# Altium PCB GATEWAY.PcbDoc
Units mil, origin at the board's own origin, x right, y up, seen from the top; angles counter-clockwise.
Board outline 2898.77 x 4223.77 mil, 2 copper layers (Top Layer, Bottom Layer); 20 components, 18 nets, 109 pads, 11 vias.
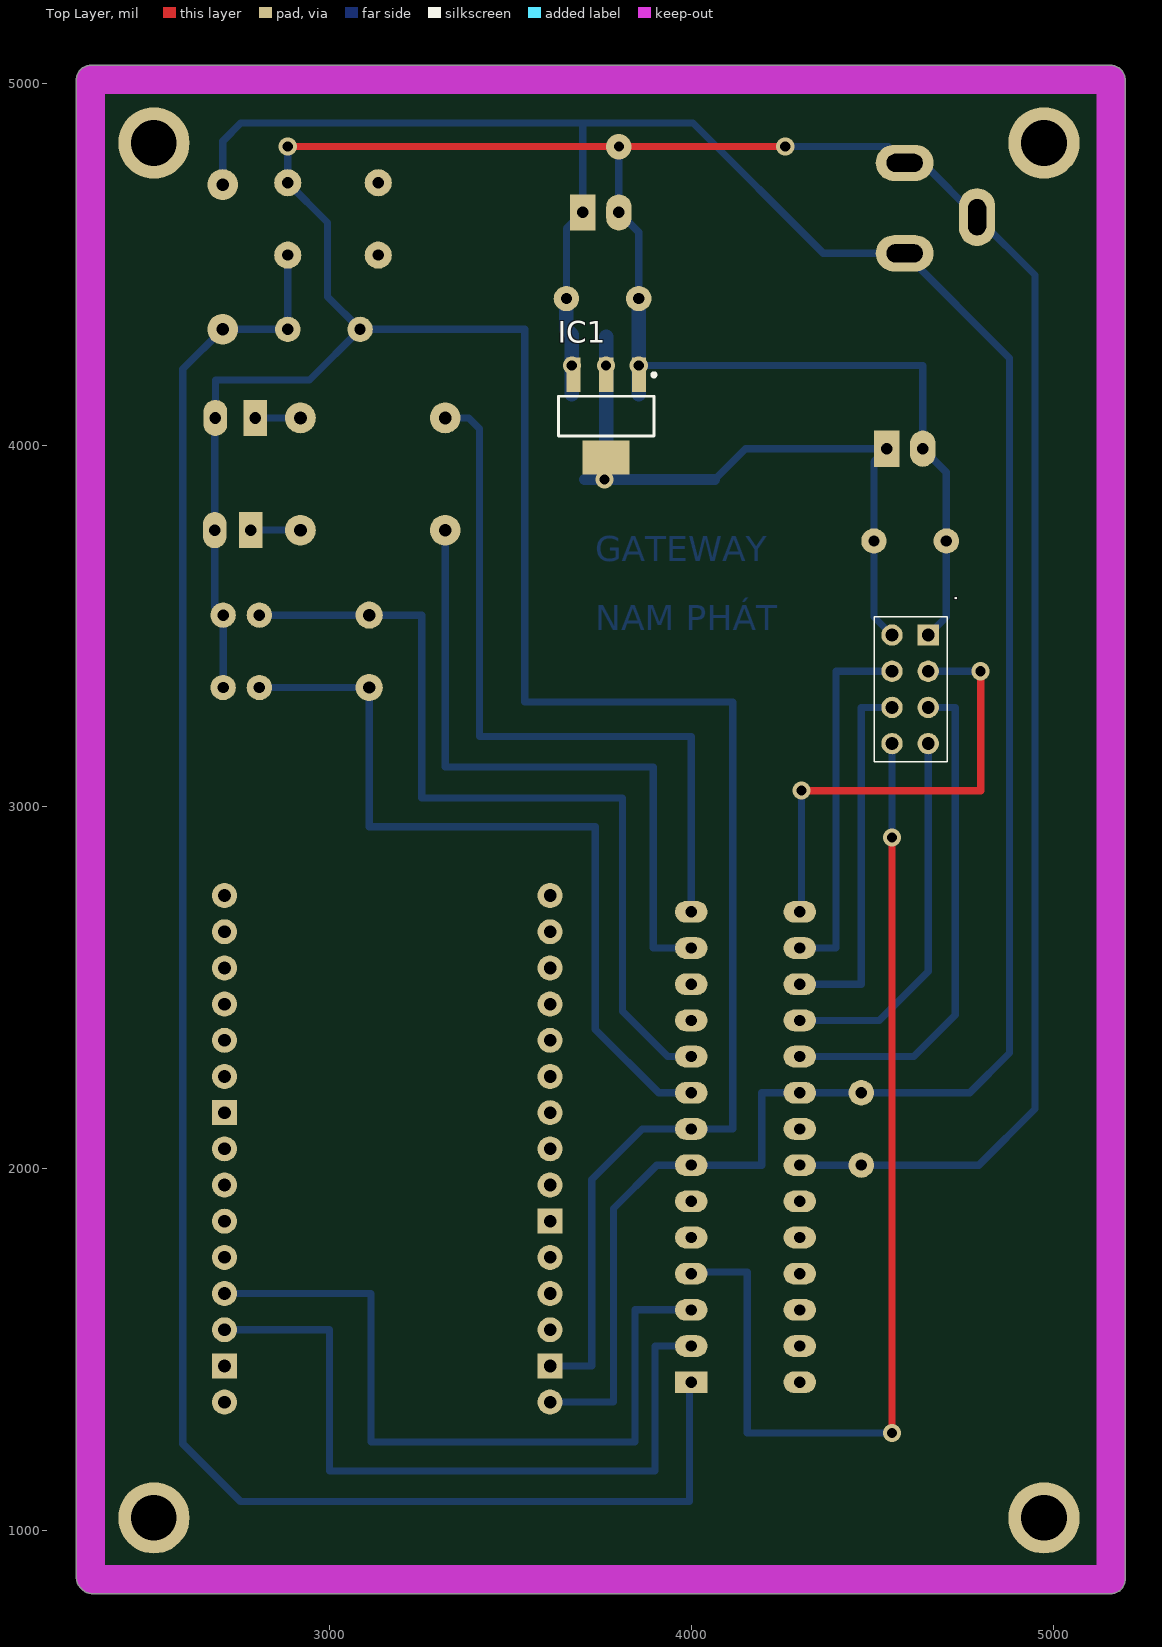
[diagram p0: Top Layer view]
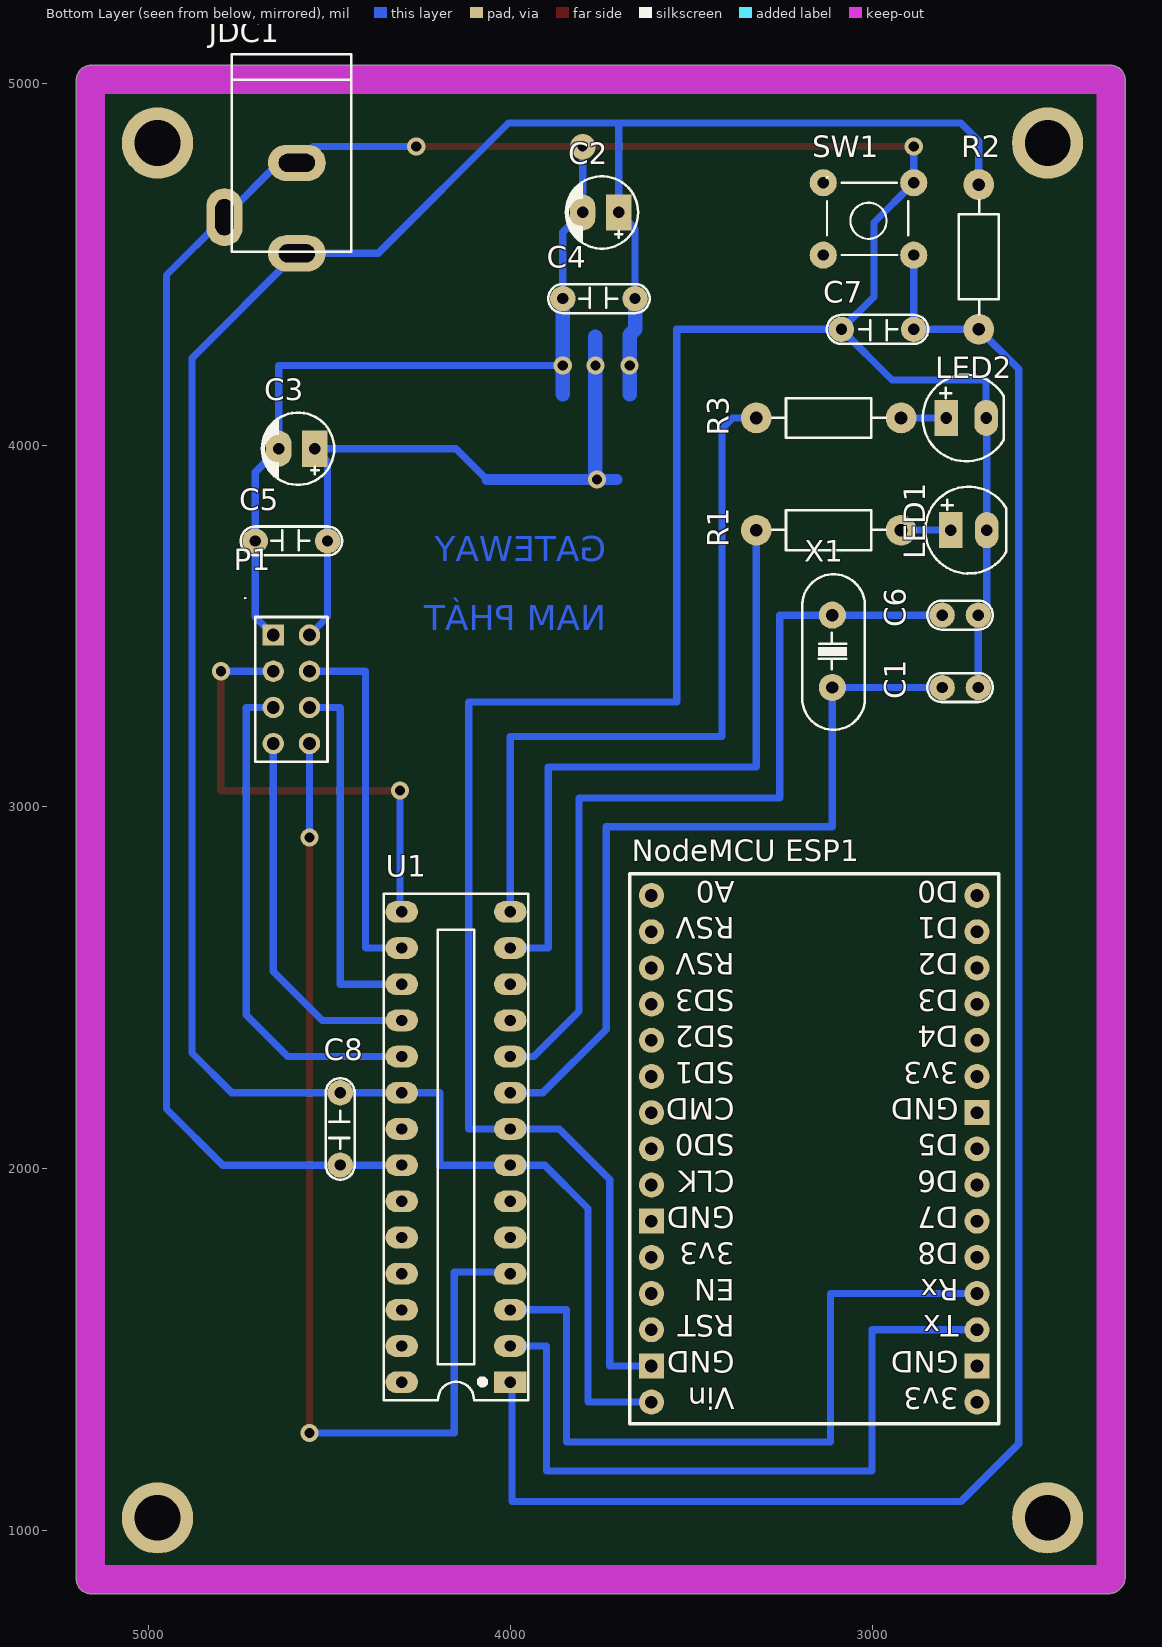
[diagram p1: Bottom Layer view, seen from below]
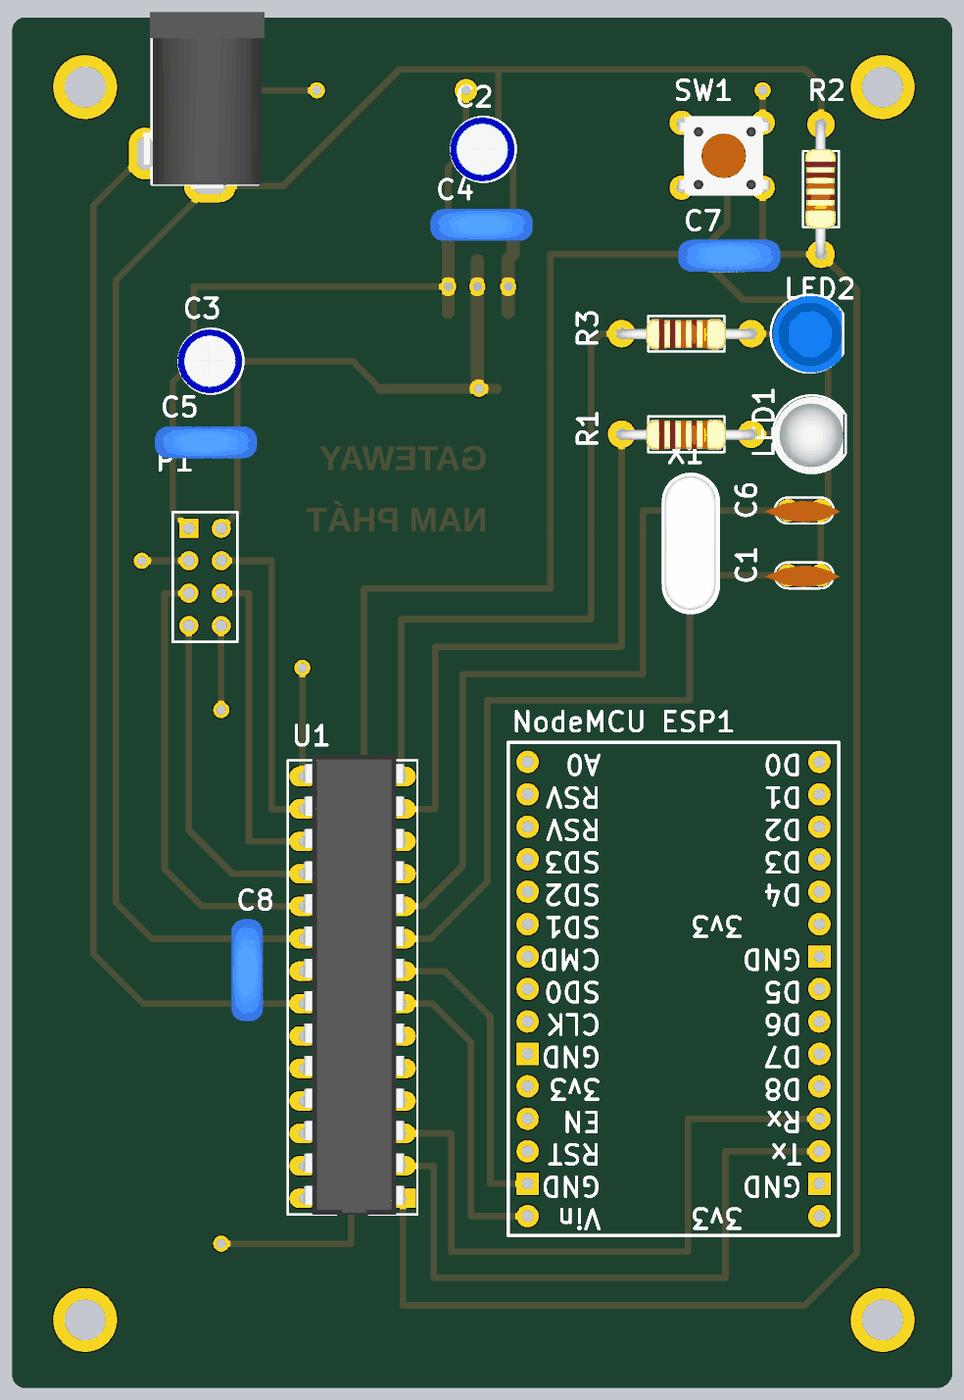
[diagram p2: 3D render of the assembled board from below, using the file's embedded part models]

## Layer stack, top to bottom
Top Solder: solder mask 0.4, Solder Resist, Dk 3.5
Top Layer: signal copper 1.4
Dielectric 1: dielectric 12.6, FR-4, Dk 4.8
Bottom Layer: signal copper 1.4
Bottom Solder: solder mask 0.4, Solder Resist, Dk 3.5

## Board outline
2300.61,870 ccw(c2340,870) 2314.76,839.76 ccw(c2345,865) 2345,825.62 5160,825.62 ccw(c5160,865) 5199.39,865 5199.39,5010 ccw(c5160,5010) 5160,5049.39 2340,5049.39 ccw(c2340,5010) 2300.61,5010

## Design rules (kind name [scope] priority, off if disabled: settings)
Clearance [All] p1: gap=20 ignorepadtopadclearanceinfootprint=FALSE
PolygonConnect [All] p1: connectstyle=Relief reliefconductorwidth=10 reliefentries=4 polygonreliefangle="90 Angle" airgapwidth=10
RoutingVias [All] p1: holewidth=30 width=70 viastyle="Through Hole" minholewidth=30 minwidth=70 maxholewidth=30 maxwidth=70
SolderMaskExpansion [All] p1: expansion=4
Width [All] p1: maxlimit=20 minlimit=20 preferedwidth=20
30 further rules are at their usual default settings.

## Components (designator, comment, footprint, x,y, rotation, side; value= is the part's Value field where it differs from the comment)
C1 "22pF" CN1 2706.43,3330 r0 bottom value=100pF
C2 "10uF" CP1/2 3700,4643 r0 bottom value=10uF/50V
C3 "10uF" CP1/2 4540,3990 r0 bottom value=10uF/50V
C4 "104" CN2 3855,4405 r180 bottom value=0.1uF
C5 "104" CN2 4705,3735 r180 bottom value=0.1uF
C6 "22pF" CN1 2706.43,3530 r0 bottom value=100pF
C7 "104" CN2 2885,4320 r0 bottom value=0.1uF
C8 "104" CN2 4470,2010 r90 bottom value=0.1uF
IC1 "LM1117" SOT223-4N 3765,4080 r270 top value=LM317
JDC1 "Jac DC" DC0 4690,4655 r270 bottom
LED1 "LED" LED-5-Yellow 2783,3765 r180 bottom value="LED 3 ly Single Colour"
LED2 "LED" LED-5-BLUE 2740,4075 r180 bottom value="LED 3 ly Single Colour"
"NodeMCU ESP1" "NodeMCU" "NodeMCU DevKit v1.0 - Inside Labels" 2710,1355 r0 bottom
P1 "Header 4X2" HDR2X4 4655,3475 r270 bottom
R1 "330" R1/2W 2920,3765 r0 bottom value="R1/4W - 1K"
R2 "10K" R1/2W 2705,4320 r90 bottom value="R1/4W - 1K"
R3 "330" R1/2W 2920,4075 r0 bottom value="R1/4W - 1K"
SW1 "SW" SW4 2885,4525 r0 bottom value="Button chip 4 pin"
U1 "ATmega328-PU" DIP28 4000,1410 r90 bottom
X1 "16Mhz" XT2 3110,3430 r270 bottom value=4Mhz

## Footprints (in the part's own frame and the unit in brackets; to place one, negate y for a bottom-side part, rotate by r counter-clockwise, add the part's x,y. Pads: shape width x height; smd on the part's side, far side on the other; paste and mask are expansions set on the pad)
CN1 [mil]
  round 70 hole 31: 1(0,0) 2(100,0)
  silkscreen extent -40,-40 141,40, body extent -60,-30 170,37, height 265
CN2 [mil]
  round 70 hole 31: 1(0,0) 2(200,0)
  silkscreen extent -40,-40 240,40, body extent -54,-44 260,55, height 407
CP1/2 [mil] "Tu hoa < 22uF/16>50V"
  rect 70x100 hole 32: 1(0,0)
  oval 70x100 hole 32: 2(100,0)
  silkscreen extent -53,-100 147,100, body extent -49,-99 149,99, height 287
DC0 [mil] "Jac DC input"
  oval 100x160 hole 50 slot 100 at 90 deg: 1(125,100) 2(-125,100)
  oval 160x100 hole 50 slot 100 at 0 deg: 3(25,-100)
  silkscreen extent -425,-80 120,250, body extent -410,-105 134,269, height 434
DIP28 [mil] "DIP, 18-Leads, Row Spacing 7.62mm, Pitch 2.54mm, Body 22.8x7.3mm, Window"
  rect 60x90 hole 31: 1(0,0)
  oval 60x90 hole 31: 2(100,0) 3(200,0) 4(300,0) 5(400,0) 6(500,0) 7(600,0) 8(700,0) 9(800,0) 10(900,0) 11(1000,0) 12(1100,0) 13(1200,0) 14(1300,0) 15(1300,300) 16(1200,300) 17(1100,300) 18(1000,300) 19(900,300) 20(800,300) 21(700,300) 22(600,300) 23(500,300) 24(400,300) 25(300,300) 26(200,300) 27(100,300) 28(0,300)
  silkscreen extent -50,-50 1350,350, body extent -50,-10 1367,300, height 200
HDR2X4 [mm]
  rect 1.5x1.5 hole 0.9: 1(0,0)
  round 1.5 hole 0.9: 2(0,2.54) 3(2.54,0) 4(2.54,2.54) 5(5.08,0) 6(5.08,2.54) 7(7.62,0) 8(7.62,2.54)
  silkscreen extent -1.27,-1.27 8.89,3.81, body extent -1.27,-1.27 8.89,3.81, height 8.89
LED-5-BLUE [mil] "LED 2 PIN, 5 ly , Only colour, pin to pin 110mil"
  rect 65x100 hole 32: 1(-55,0)
  oval 65x100 hole 32: 2(55,0)
  silkscreen extent -120,-120 104,120, body extent -113,-120 100,116, height 339
LED-5-Yellow [mil] "LED 2 PIN, 5 ly , Only colour,pin to pin 100mil"
  rect 65x100 hole 32: 1(0,0)
  oval 65x100 hole 32: 2(100,0)
  silkscreen extent -70,-120 154,120, body extent -67,-122 147,115, height 339
"NodeMCU DevKit v1.0 - Inside Labels" [mil]
  round 69 hole 35: 1(0,0) 3(0,-200) 4(0,-300) 5(0,-400) 6(0,-500) 7(0,-600) 8(0,-700) 10(0,-900) 11(0,-1000) 12(0,-1100) 13(0,-1200) 14(0,-1300) 15(0,-1400) 16(900,-1400) 17(900,-1300) 18(900,-1200) 19(900,-1100) 20(900,-1000) 21(900,-900) 22(900,-800) 23(900,-700) 24(900,-600) 26(900,-400) 27(900,-300) 28(900,-200) 30(900,0)
  rect 69x69 hole 35: 2(0,-100) 9(0,-800) 25(900,-500) 29(900,-100)
  silkscreen extent -60,-1460 960,60
R1/2W [mil] "R 1/2W, 2 pin, 300mil"
  round 85 hole 35: 1(0,0) 2(400,0)
  silkscreen extent 42,-55 356,55, body extent -12,-45 414,49, height 91
SOT223-4N [mm] "SOT223, 4-Leads, Body 6.5x3.5mm, Pitch 2.3mm, Lead Span 7mm, IPC Medium Density"
  rect 2.4x1 smd: 1(-2.9,2.3) 2(-2.9,0) 3(-2.9,-2.3)
  rect 2.4x3.3 smd: 4(2.9,0)
  silkscreen extent -3.02,-3.35 1.4,3.48, body extent -3.39,-3.27 3.5,3.23, height 1.72
SW4 [mil] "SW button 4pin, 250 x250 mil"
  round 75 hole 31: 1(0,0) 2(250,-200) 3(250,0) 4(0,-200)
  silkscreen extent 15,-215 240,0, body extent -36,-220 276,24, height 276
XT2 [mil] "Footpin for Crystal 2 pin"
  round 75 hole 34: 1(-100,0) 2(100,0)
  silkscreen extent -213,-83 217,90, body extent -216,-87 216,90, height 144

## Part data
C1 C6: library part CN1, "Cap np  1pF - 472pF"
C2 C3: library part CP1, "Cap P  0,1uF < 22uF , 16 - 50V", Description 1="10 => 220uF/6,3V/10V - 10uF => 100uF/16V", Description 2="0,1uF => 33uF/50V - 10uF => 22uF/63V", Description 3="0,47uF => 10uF/100V"
C4 C5 C7 C8: library part CN2, "Cap np 104 => 105pF"
IC1: "Available in 1.8V, 2.5V, 2.85V, 3.3V, 5V, and  Adjustable Versions"
JDC1: library part DCIN, "Jac DC input"
LED1 LED2: "LED Single colour Green and Red"
"NodeMCU ESP1": library part "NodeMCU DevKit v1.0"
P1: "Header, 4-Pin, Dual row", LatestRevisionDate=17-Jul-2002, LatestRevisionNote="Re-released for DXP Platform.", Publisher="Altium Limited"
R1 R2 R3: library part R1/4W, "Resistor 1/4W"
SW1: library part SW4, "Switch button 4 pin"
U1: "8-bit AVR Microcontroller, 32KB Flash, 1KB EEPROM, 2KB SRAM, 28-pin PDIP, Industrial Grade (-40°C to 85°C)", Supplier Part Number 1=ATMEGA328-PU-ND, ComponentLink1Description="Manufacturer Link", ComponentLink1URL=http://www.atmel.com/products/avr/default.asp?, ComponentLink2Description="ATmega48A/48PA/88A/88PA/168A/168PA/328/328P Datasheet", ComponentLink2URL=http://www.atmel.com/dyn/resources/prod_documents/8271.pdf, ComponentLink3Description="ATmega48A/48PA/88A/88PA/168A/168PA/328/328P Summary", ComponentLink3URL=http://www.atmel.com/dyn/resources/prod_documents/8271S.pdf, ComponentLink4Description="Atmel.com Home", ComponentLink4URL=http://www.atmel.com, DatasheetVersion="revA, Jan-2010", PackageDescription="28-lead (0.300\"/7.62mm Wide) Plastic Dual Inline Package (PDIP)", PackageReference=28P3, PackageVersion="revB, Sep-2001", Published=1-Apr-2010, Publisher="Altium Limited", Supplier 1=Digi-Key, Supplier 2=Mouser, Supplier Part Number 2=556-ATMEGA328-PU
X1: library part XT2, "Crystal For all Crystal 2pin."

## Free pads (board coordinates)
  round 196.85 hole 125.98: 2(2515,1035) 2(2515,4835) 2(4975,1035) 2(4975,4835)

## Via types
v1: diameter 50, hole 28, Top Layer to Bottom Layer, 10 vias
v2: diameter 70, hole 28, Top Layer to Bottom Layer, 1 vias

## Nets (pads, with @x,y where several pads share a name; then routed paths per layer and width w, separated by ;. In a path a pad name is that pad's centre, name@x,y a point inside that pad or via, vN(x,y) a via of type N, cw(c..) or ccw(c..) an arc to the next point about the centre after c; other vN are vias at no path point)
+5: "NodeMCU ESP1.30" C2.1 C4.2 C8.2 IC1.3 JDC1.1 R2.2 U1.7 U1.20 | length 7380.1
  Bottom Layer w20: R2.2 2705,4840 2755,4890 3700,4890 ; 3610,1355 3785,1355 3785,1890 3905,2010 U1.7 4195,2010 4195,2210 U1.20 C8.2 4770,2210 4880,2320 4880,4240 JDC1.1 4365,4530 4005,4890 3700,4890 ; C4.2 3655,4598 C2.1 3700,4890
  Bottom Layer w40: C4.2 3655,4320 3670,4305 v1(3670,4220) 3670,4140
DIO0: P1.8 U1.4 | length 2910
  Top Layer w20: v1(4555,1270) v1(4555,2915)
  Bottom Layer w20: U1.4 4000,1715 4155,1715 4155,1270 v1(4555,1270) ; v1(4555,2915) P1.8
GND: "NodeMCU ESP1.29" C1.1 C2.2 C3.2 C4.1 C5.1 C6.1 C7.2 C8.1 IC1.1 JDC1.2 JDC1.3 LED1.2 LED2.2 P1.1 SW1.4 U1.8 U1.22 | length 13741
  Top Layer w20: v1(2885,4825) v2(3800,4825) v1(4260,4825)
  Bottom Layer w20: LED2.2@2683,4045 2683,3553.43 C6.1 C1.1 ; LED2.2@2683,4075 LED2.2@2685,4077 ; LED2.2@2685,4047 2685,4180 2945,4180 C7.2 ; v1(2885,4825) SW1.4 2995,4615 2995,4410 C7.2 ; 3610,1455 3725,1455 3725,1970 3865,2110 U1.8 4115,2110 4115,3290 3540,3290 3540,4320 C7.2 ; v2(3800,4825) C2.2 3855,4588 C4.1 ; v1(3855,4220) 4640,4220 C3.2 4705,3925 C5.1 4705,3525 P1.1 ; v1(4260,4825) 4545,4825 JDC1.2 4640,4780 JDC1.3 4950,4470 4950,2165 4795,2010 C8.1 U1.22
  Bottom Layer w40: 3855,4140 v1(3855,4220) C4.1
LED0: R1.2 U1.13 | length 1835
  Bottom Layer w20: R1.2 3320,3110 3895,3110 3895,2610 U1.13
LED1: R3.2 U1.14 | length 2027.4
  Bottom Layer w20: R3.2 3385,4075 3415,4045 3415,3195 4000,3195 U1.14
MISO: P1.7 U1.18 | length 1040.9
  Bottom Layer w20: U1.18 4520,2410 4655,2545 P1.7
MOSI: P1.6 U1.17 | length 1020
  Bottom Layer w20: U1.17 4470,2510 4470,3275 P1.6
NetLED1_1: LED1.1 R1.1 | length 137
  Bottom Layer w20: LED1.1 R1.1
NetLED2_1: LED2.1 R3.1 | length 137
  Bottom Layer w20: LED2.1@2783,4075 R3.1
NSS: P1.4 U1.16 | length 1020
  Bottom Layer w20: U1.16 4400,2610 4400,3375 P1.4
OSC1: C1.2 U1.9 X1.2 | length 2211.1
  Bottom Layer w20: C1.2 X1.2 3110,2945 3735,2945 3735,2385 3910,2210 U1.9
OSC2: C6.2 U1.10 X1.1 | length 2340.3
  Bottom Layer w20: C6.2 X1.1 3255,3530 3255,3025 3810,3025 3810,2435 3935,2310 U1.10
PD0: "NodeMCU ESP1.3" U1.2 | length 2025
  Bottom Layer w20: 2710,1555 3000,1555 3000,1165 3900,1165 3900,1510 U1.2
PD1: "NodeMCU ESP1.4" U1.3 | length 2065
  Bottom Layer w20: 2710,1655 3115,1655 3115,1245 3845,1245 3845,1610 U1.3
RESET: C7.1 R2.1 SW1.1 U1.1 | length 5308.9
  Bottom Layer w20: SW1.1 C7.1 R2.1 2595,4210 2595,1240 2755,1080 3995,1080 3995,1405 U1.1
RST: P1.3 U1.15 | length 1307.1
  Top Layer w20: v1(4305,3045) 4800,3045 v1(4800,3375)
  Bottom Layer w20: U1.15 4305,2715 v1(4305,3045) ; P1.3 v1(4800,3375)
SCK: P1.5 U1.19 | length 1402.6
  Bottom Layer w20: U1.19 4615,2310 4730,2425 4730,3275 P1.5
VCC3.3: C3.1 C5.2 IC1.2 P1.2 | length 1807.5
  Bottom Layer w20: 4065,3905 4150,3990 C3.1 4505,3955 C5.2 4505,3525 P1.2
  Bottom Layer w30: 3705,3905 v1(3760,3905) ; v1@3765,3910 3770,3905 4065,3905
  Bottom Layer w40: v1@3765,3910 v1(3765,4220) 3765,4300
pads on no net: "NodeMCU ESP1.1" "NodeMCU ESP1.2" "NodeMCU ESP1.5" "NodeMCU ESP1.6" "NodeMCU ESP1.7" "NodeMCU ESP1.8" "NodeMCU ESP1.9" "NodeMCU ESP1.10" "NodeMCU ESP1.11" "NodeMCU ESP1.12" "NodeMCU ESP1.13" "NodeMCU ESP1.14" "NodeMCU ESP1.15" "NodeMCU ESP1.16" "NodeMCU ESP1.17" "NodeMCU ESP1.18" "NodeMCU ESP1.19" "NodeMCU ESP1.20" "NodeMCU ESP1.21" "NodeMCU ESP1.22" "NodeMCU ESP1.23" "NodeMCU ESP1.24" "NodeMCU ESP1.25" "NodeMCU ESP1.26" "NodeMCU ESP1.27" "NodeMCU ESP1.28" IC1.4 SW1.2 SW1.3 U1.5 U1.6 U1.11 U1.12 U1.21 U1.23 U1.24 U1.25 U1.26 U1.27 U1.28

## Keep-outs
Keep-Out Layer:
  lines w78.74: 2340,870 2340,5010 5160,5010 5160,865 2345,865

## Other copper
Bottom Layer:
  text "GATEWAY" at 3735,3655 h120
  text "NAM PHÁT" at 3735,3465 h120

## Dimensions
2300,5245 to 5200,5215 on Multi-Layer
5440,5050 to 5455,825 on Multi-Layer

## Text inside footprints (layer, text, board x,y; h text height)
"NodeMCU ESP1": Bottom Overlay "Vin" at 3380,1394.99 h60 r180; Bottom Overlay "GND" at 3380,1494.99 h60 r180; Bottom Overlay "RST" at 3380,1594.99 h60 r180; Bottom Overlay "EN" at 3380,1694.99 h60 r180; Bottom Overlay "3v3" at 3380,1794.99 h60 r180; Bottom Overlay "GND" at 3380,1894.99 h60 r180; Bottom Overlay "CLK" at 3380,1994.99 h60 r180; Bottom Overlay "SD0" at 3380,2094.99 h60 r180; Bottom Overlay "CMD" at 3380,2194.99 h60 r180; Bottom Overlay "SD1" at 3380,2294.99 h60 r180; Bottom Overlay "SD2" at 3380,2394.99 h60 r180; Bottom Overlay "SD3" at 3380,2494.99 h60 r180; Bottom Overlay "RSV" at 3380,2594.99 h60 r180; Bottom Overlay "RSV" at 3380,2694.99 h60 r180; Bottom Overlay "A0" at 3380,2794.99 h60 r180; Bottom Overlay "D0" at 2760,2794.99 h60 r180; Bottom Overlay "D1" at 2760,2694.99 h60 r180; Bottom Overlay "D2" at 2760,2594.99 h60 r180; Bottom Overlay "D3" at 2760,2494.99 h60 r180; Bottom Overlay "D4" at 2760,2394.99 h60 r180; Bottom Overlay "3v3" at 2760,2294.99 h60 r180; Bottom Overlay "GND" at 2760,2194.99 h60 r180; Bottom Overlay "D5" at 2760,2094.99 h60 r180; Bottom Overlay "D6" at 2760,1994.99 h60 r180; Bottom Overlay "D7" at 2760,1894.99 h60 r180; Bottom Overlay "D8" at 2760,1794.99 h60 r180; Bottom Overlay "Rx" at 2760,1694.99 h60 r180; Bottom Overlay "Tx" at 2760,1594.99 h60 r180; Bottom Overlay "GND" at 2760,1494.99 h60 r180; Bottom Overlay "3v3" at 2760,1394.99 h60 r180